# Altium PCB Coin.PcbDoc (part 2 of 2)
Units mm, origin at the board's own origin, x right, y up, seen from the top; angles counter-clockwise.
Board outline 39.43 x 39.88 mm, 4 copper layers (Top Layer, Layer 1, Layer 2, Bottom Layer), stack 1.008 mm thick; 78 components, 48 nets, 291 pads, 74 vias.
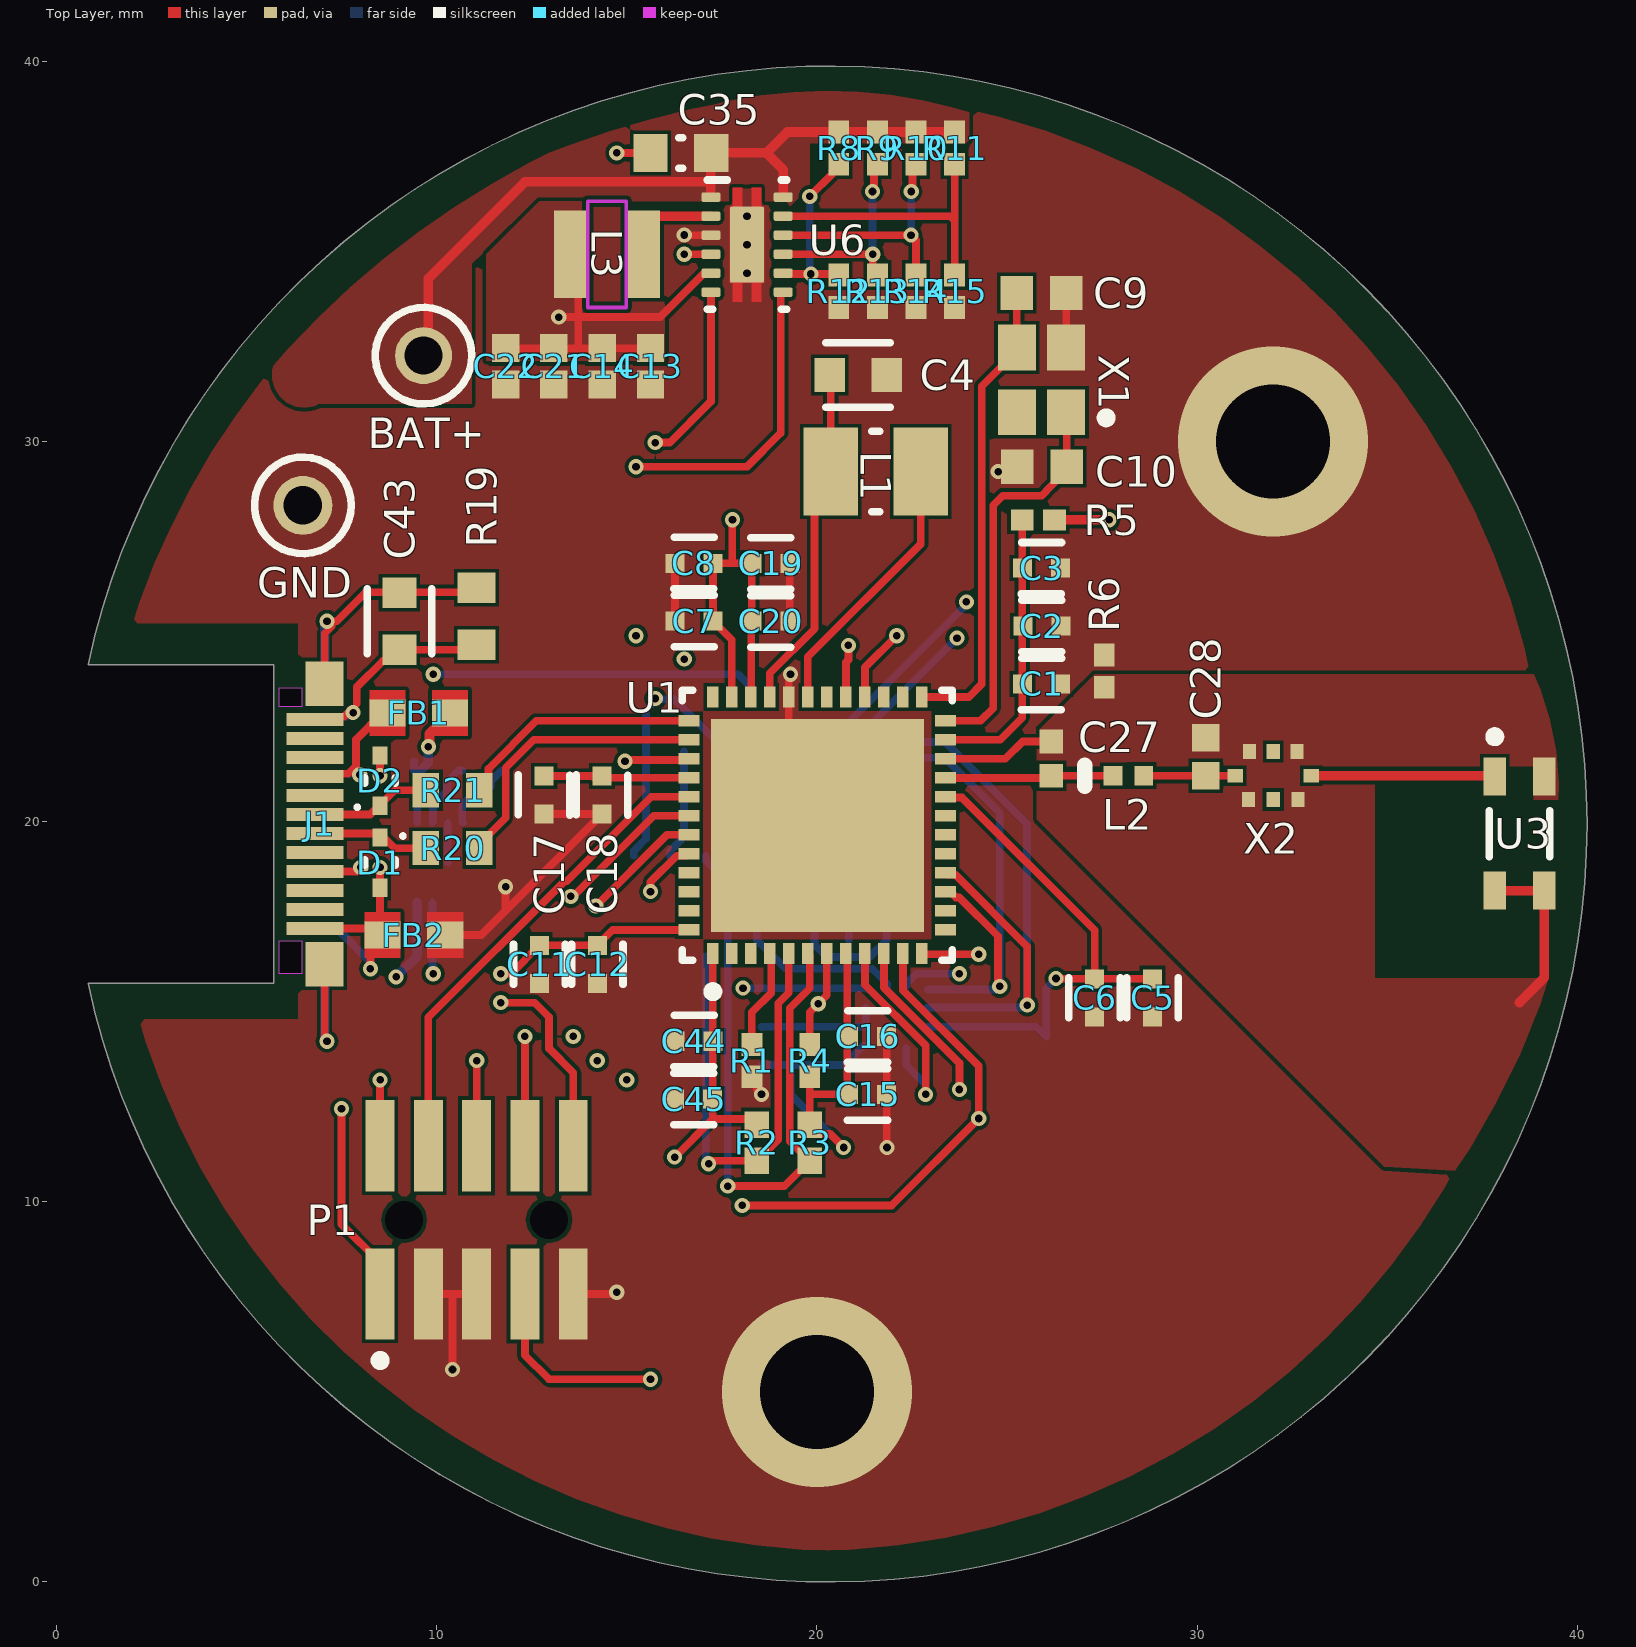
[diagram p0: Top Layer view]

## Via types
v1: diameter 0.4, hole 0.2, Top Layer to Bottom Layer, 69 vias
v2: diameter 0.5, hole 0.2, Top Layer to Bottom Layer, 3 vias
v3: diameter 5, hole 3, Top Layer to Bottom Layer, 2 vias

## Nets (pads, with @x,y where several pads share a name; then routed paths per layer and width w, separated by ;. In a path a pad name is that pad's centre, name@x,y a point inside that pad or via, vN(x,y) a via of type N, cw(c..) or ccw(c..) an arc to the next point about the centre after c; other vN are vias at no path point) (continued)
SPI1_MOSI: (continued)
  Bottom Layer w0.203: U4.14 21.836,22.075 21.859,22.098 23.368,22.098 25.527,19.939 25.527,15.166 25.47,15.109 U2.2
SPI1_SCK: U1.10 U2.12 U4.13 | length 21.7
  Top Layer w0.203: U1.10 21.762,15.639 23.749,13.652 v1(23.749,12.954)
  Layer 1 w0.203: v1(23.685,24.828) 23.749,24.765 v1(23.749,16.002) v1(23.749,12.954)
  Bottom Layer w0.203: U4.13 21.336,22.479 v1(23.685,24.828) ; U2.12 22.348,15.739 22.611,16.002 v1(23.749,16.002)
SPI2C1_SCL: R2.2 U1.5 U5.1 | length 12.6
  Top Layer w0.203: v1(17.151,11.002) 17.231,11.082 R2.2 18.415,11.107 18.638,11.33 18.674,11.33 18.982,11.639 18.982,15.22 19.262,15.5 U1.5
  Bottom Layer w0.203: U5.1 17.079,11.074 v1(17.151,11.002)
SPI2C1_SDA: R3.2 U1.6 U5.6 | length 17.3
  Top Layer w0.203: v1(17.653,10.414) 19.144,10.414 19.564,10.834 19.589,10.834 19.812,11.057 R3.2 19.812,11.107 19.589,11.33 19.553,11.33 19.285,11.599 19.285,15.094 19.812,15.621 19.812,15.947 19.81,15.948 19.81,16.48 U1.6
  Bottom Layer w0.203: U5.6 17.079,18.98 17.653,18.406 v1(17.653,10.414)
UGND: C43.2 D1.2 D2.2 FB2.2 J1.A1 J1.A12 J1.B1 J1.B12 R19.2 | length 17.7
  Top Layer w0.203: J1.A1 8.402,17.189 FB2.2@8.509,17.082 ; J1.A12 6.873,22.762 7.558,22.762 v1@7.732,22.936 ; 7.896,23.1 7.896,23.544 8.577,24.225 8.719,24.225 C43.2 10.922,24.523 R19.2 ; v1(8.255,16.129) 8.255,16.77 8.503,17.018 FB2.2 FB2.2@8.509,17.082 ; v1(8.509,18.796) D1.2 FB2.2@8.509,17.082 ; v1(8.509,21.209) D2.2
  Layer 1 w0.203: v1(7.798,22.87) 8.509,22.159 v1(8.509,21.209) v1(8.509,18.796)
  Bottom Layer w0.203: J1.B12 7.375,17.189 8.255,16.309 v1(8.255,16.129) ; J1.B1 6.873,22.762 7.637,22.762 7.745,22.87 v1(7.798,22.87)
USB: FB1.2 J1.A4 J1.A9 J1.B4 J1.B9 | length 9
  Top Layer w0.203: J1.A4 7.894,18.689 v1(8.001,18.796) ; J1.A9 6.873,21.262 7.673,21.262 7.874,21.463 7.874,22.159 8.573,22.858 FB1.2@8.573,22.86
  Layer 1 w0.203: v1(7.974,21.236) 7.974,18.823 v1(8.001,18.796)
  Bottom Layer w0.203: J1.B9 7.841,18.689 7.948,18.796 v1(8.001,18.796) ; J1.B4 6.873,21.262 7.948,21.262 v1(7.974,21.236)
USB_DM: R21.1 U1.37 | length 6.5
  Top Layer w0.203: R21.1 11.362,21.076 11.362,21.395 12.62,22.653 U1.37
USB_DP: R20.1 U1.38 | length 7.5
  Top Layer w0.203: R20.1 11.114,19.404 11.811,20.101 11.811,21.415 12.549,22.153 U1.38
WAKEUP: U1.9 U2.5 | length 5.8
  Top Layer w0.203: U1.9 21.262,15.71 22.86,14.112 v1(22.86,12.827)
  Bottom Layer w0.203: U2.5 22.348,13.593 22.86,13.081 v1(22.86,12.827)
pads on no net: J1.A2 J1.A3 J1.A5 J1.A8 J1.A10 J1.A11 J1.B2 J1.B3 J1.B5 J1.B8 J1.B10 J1.B11 P1.MH1 P1.MH2 U1.2 U1.3 U1.13 U1.14 U1.17 U1.18 U1.19 U1.26 U1.27 U1.30 U1.36 U1.45 U1.46 U1.47 U2.4 U2.6 U4.2 U4.3 U4.4 U4.9 U4.10 U4.11 U7.5 U7.6 U7.7 U7.8 X1.4 X2.2 X2.6

## Polygon pours and split planes (outlines as drawn)
GND on Top Layer "GND_L01_P011" (solid, pour order 11): 20.331,39.18 cw(c19.785,19.774) 38.746,23.94 ccw(c38.79,17.317) 36.841,10.987 cw(c19.697,20.365) 20.226,0.83 cw(c20.851,20.294) 2.17,14.797 6.361,14.797 6.361,25.21 2.011,25.219 cw(c21.214,19.085) 9.779,35.687 cw(c20.166,21.992)
GND_RF on Top Layer "GND_RF_L01_P003" (solid, pour order 3): 34.671,21.604 34.671,15.875 39.243,15.875 cw(c20.042,22.111) 36.773,10.814 34.925,10.922 25.781,20.066 25.781,21.604
+BAT on Top Layer "+BAT_L01_P005" (solid, pour order 5): 10.922,30.988 6.891,30.988 cw(c6.514,31.74) 5.715,32.004 cw(c23.38,16.603) 12.954,37.592 cw(c22.401,13.446) 17.272,38.862 cw(c20.265,26.404) 24.003,38.659 24.003,37.846 19.812,37.846 19.812,36.703 19.304,36.195 19.177,36.322 12.573,36.322 10.922,34.671
+3.3_MCU on Top Layer "+3.3_MCU_L01_P004" (solid, pour order 4): 11.303,32.131 16.002,32.131 16.002,34.417 14.097,36.322 12.7,36.322 11.303,34.925
GND_RF on Top Layer "GND_RF_L01_P002" (solid, pour order 2): 25.781,21.463 25.781,22.352 27.305,23.876 38.862,23.876 cw(c31.856,20.817) 39.497,20.574 38.862,20.574 38.862,21.463
no net on Top Layer "NONET_L01_P001" (solid, pour order 1): 25.527,21.463
no net on Top Layer "NONET_L01_P000" (solid, pour order 0): 25.908,21.717
GND on Bottom Layer "GND_L04_P010" (solid, pour order 10): 20.447,39.115 cw(c19.901,19.71) 38.862,23.876 ccw(c38.907,17.252) 36.957,10.922 cw(c19.813,20.3) 20.342,0.766 cw(c20.967,20.229) 2.286,14.732 6.477,14.732 6.477,25.145 2.127,25.154 cw(c20.309,20.295)
GND on Bottom Layer "GND_L04_P006" (solid, pour order 6): 20.447,39.115 cw(c19.901,19.71) 38.862,23.876 ccw(c38.907,17.252) 36.957,10.922 cw(c19.813,20.3) 20.342,0.766 cw(c20.967,20.229) 2.286,14.732 6.477,14.732 6.477,25.145 2.127,25.154 cw(c20.309,20.295)
GND on Layer 1 "GND_L02_P009" (solid, pour order 9): 20.435,39.157 cw(c19.889,19.752) 38.85,23.918 ccw(c38.895,17.294) 36.945,10.964 cw(c19.801,20.342) 20.33,0.808 cw(c20.955,20.271) 2.274,14.774 6.465,14.774 6.465,25.187 2.115,25.196 cw(c20.298,20.337)
+3.3_MCU on Layer 2 "+3.3_MCU_L03_P012" (solid, pour order 12): 20.331,39.18 cw(c19.785,19.774) 38.746,23.94 ccw(c38.79,17.317) 36.841,10.987 cw(c19.697,20.365) 20.226,0.83 cw(c20.851,20.294) 2.17,14.797 6.361,14.797 6.361,25.21 2.011,25.219 cw(c20.193,20.36)

## Text inside footprints (layer, text, board x,y; h text height)
FB1: Mechanical 6 "Land Pattern Adapted for Flow Soldering and 18um Land Pad Thickness" at 11.175,22.06 h0.05 r180
FB2: Mechanical 6 "Land Pattern Adapted for Flow Soldering and 18um Land Pad Thickness" at 11.048,16.218 h0.05 r180